# EAGLE board led2t (EAGLE 7.7.0)
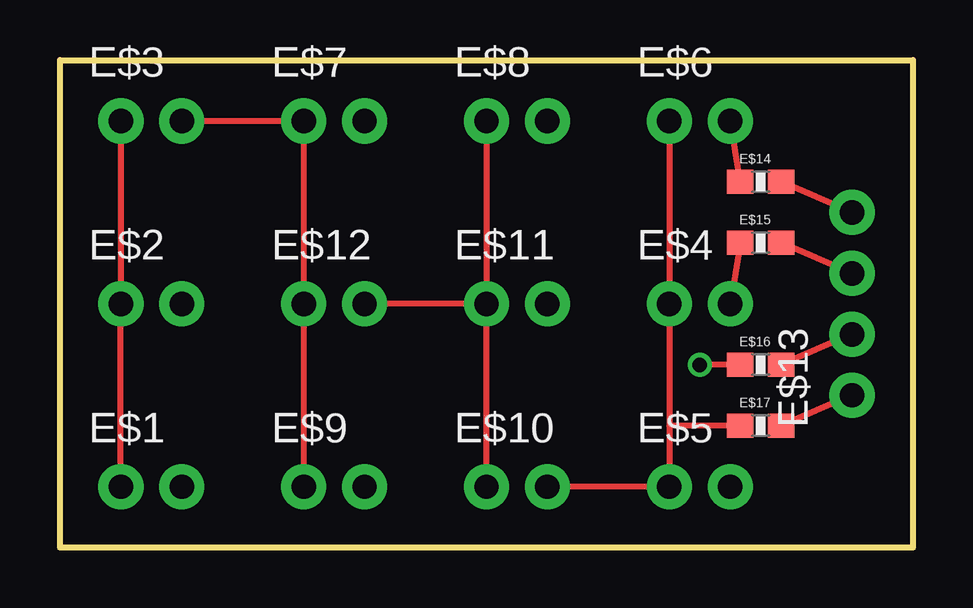
[diagram p0: board, top side]
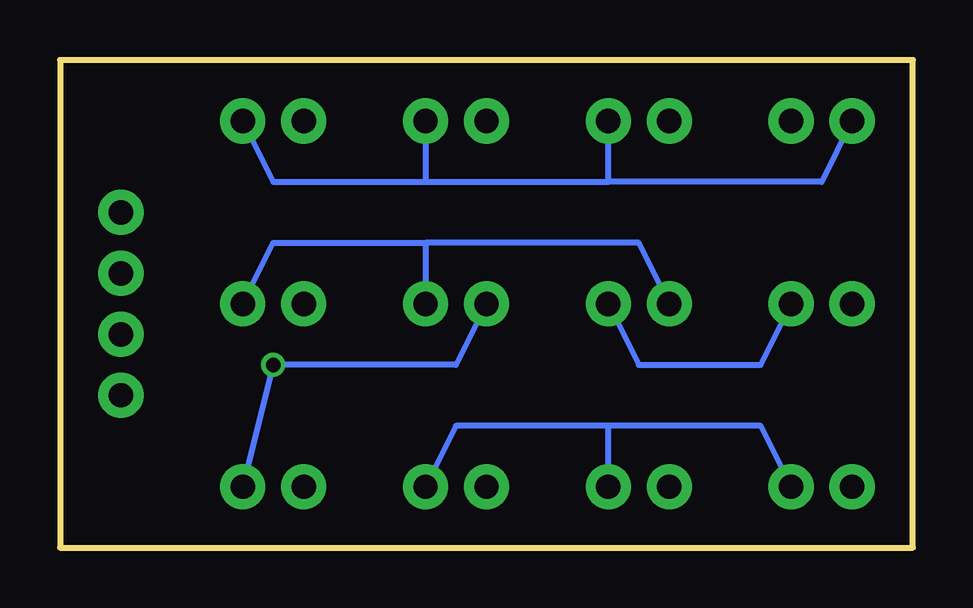
[diagram p1: board, bottom side, seen from below]

Size 35.56 x 20.32 mm. Coordinates in mm from the lower left corner, seen from the top.
Outline: 0,20.32 35.56,20.32 35.56,0 0,0 0,20.32
Copper layers (1*16): Top 0.035mm / dielectric 1.5mm / Bottom 0.035mm
Design rules "default": minimum track width 10mil, minimum drill 24mil, track to track 8mil, track to pad 8mil, pad to pad 8mil, via to via 8mil, smd to smd 8mil, copper to edge 40mil, drill to drill 8mil, minimum pad ring 10mil, minimum via ring 8mil, stop-mask expansion 4mil, vias tented up to drill 0mil, thermal gap 10mil

## Footprints (pad centres in the part's own frame; a part is rotated, then mirrored left to right if it is on the bottom)
1X02_NO_SILK = drill 1.016 pad 1.88: 1 0,0; 2 2.54,0
1X04_NO_SILK_ALL_ROUND = drill 1.016 pad 1.88: 1 0,0; 2 2.54,0; 3 5.08,0; 4 7.62,0
0603-RES = smd 1.1 x 1: 1 -0.85,0; 2 0.85,0

## Placement (x,y rotation side)
E$1  [1X02_NO_SILK]  2.54,2.54 0 top
E$2  [1X02_NO_SILK]  2.54,10.16 0 top
E$3  [1X02_NO_SILK]  2.54,17.78 0 top
E$4  [1X02_NO_SILK]  25.4,10.16 0 top
E$5  [1X02_NO_SILK]  25.4,2.54 0 top
E$6  [1X02_NO_SILK]  25.4,17.78 0 top
E$7  [1X02_NO_SILK]  10.16,17.78 0 top
E$8  [1X02_NO_SILK]  17.78,17.78 0 top
E$9  [1X02_NO_SILK]  10.16,2.54 0 top
E$10  [1X02_NO_SILK]  17.78,2.54 0 top
E$11  [1X02_NO_SILK]  17.78,10.16 0 top
E$12  [1X02_NO_SILK]  10.16,10.16 0 top
E$13  [1X04_NO_SILK_ALL_ROUND]  33.02,6.35 90 top
E$14  [0603-RES]  29.21,15.24 0 top
E$15  [0603-RES]  29.21,12.7 0 top
E$16  [0603-RES]  29.21,7.62 0 top
E$17  [0603-RES]  29.21,5.08 0 top

## Library data of the parts
E$1-E$13 = SparkFun-Connectors
E$14-E$17 = SparkFun-Resistors

## Nets
S$1: E$1.1 E$2.1 E$3.1 E$6.2 E$7.2 E$8.2 E$14.1
S$2: E$1.2 E$4.1 E$5.1 E$6.1 E$9.2 E$10.2 E$17.1
S$5: E$13.4 E$14.2
S$6: E$13.3 E$15.2
S$7: E$13.2 E$16.2
S$8: E$13.1 E$17.2
S$9: E$3.2 E$4.2 E$7.1 E$9.1 E$11.2 E$12.1 E$15.1
S$10: E$2.2 E$5.2 E$8.1 E$10.1 E$11.1 E$12.2 E$16.1

## Tracks (layer width: path | path; a pad name or v marks a point on that pad's centre or on a via)
S$1
  Top 0.254: E$3.1 E$2.1 E$1.1 | E$14.1 E$6.2
  Bottom 0.254: E$6.2 26.67,15.24 20.32,15.24 | E$8.2 20.32,15.24 | 20.32,15.24 12.7,15.24 | 12.7,15.24 E$7.2 | E$3.1 3.81,15.24 12.7,15.24
S$2
  Top 0.254: E$6.1 E$4.1 25.4,5.08 | 25.4,5.08 E$5.1 E$10.2 | E$17.1 25.4,5.08
  Bottom 0.254: E$1.2 6.35,5.08 12.7,5.08 | 12.7,5.08 19.05,5.08 E$10.2 | E$9.2 12.7,5.08
S$5
  Top 0.254: E$13.4 E$14.2
S$6
  Top 0.254: E$13.3 E$15.2
S$7
  Top 0.254: E$13.2 E$16.2
S$8
  Top 0.254: E$13.1 E$17.2
S$9
  Top 0.254: E$3.2 E$7.1 E$12.1 E$9.1 | E$15.1 E$4.2
  Bottom 0.254: E$4.2 26.67,12.7 20.32,12.7 | 20.32,12.7 E$11.2 | E$12.1 11.43,12.7 20.32,12.7
S$10  (via drill 0.6)
  Top 0.254: E$8.1 E$11.1 | E$11.1 E$12.2 | E$10.1 E$11.1 | E$16.1 v26.67,7.62
  Bottom 0.254: E$5.2 v26.67,7.62 19.05,7.62 E$11.1 | E$12.2 11.43,7.62 6.35,7.62 E$2.2